# EAGLE board driver PCB 32 FEM (EAGLE 6.4)
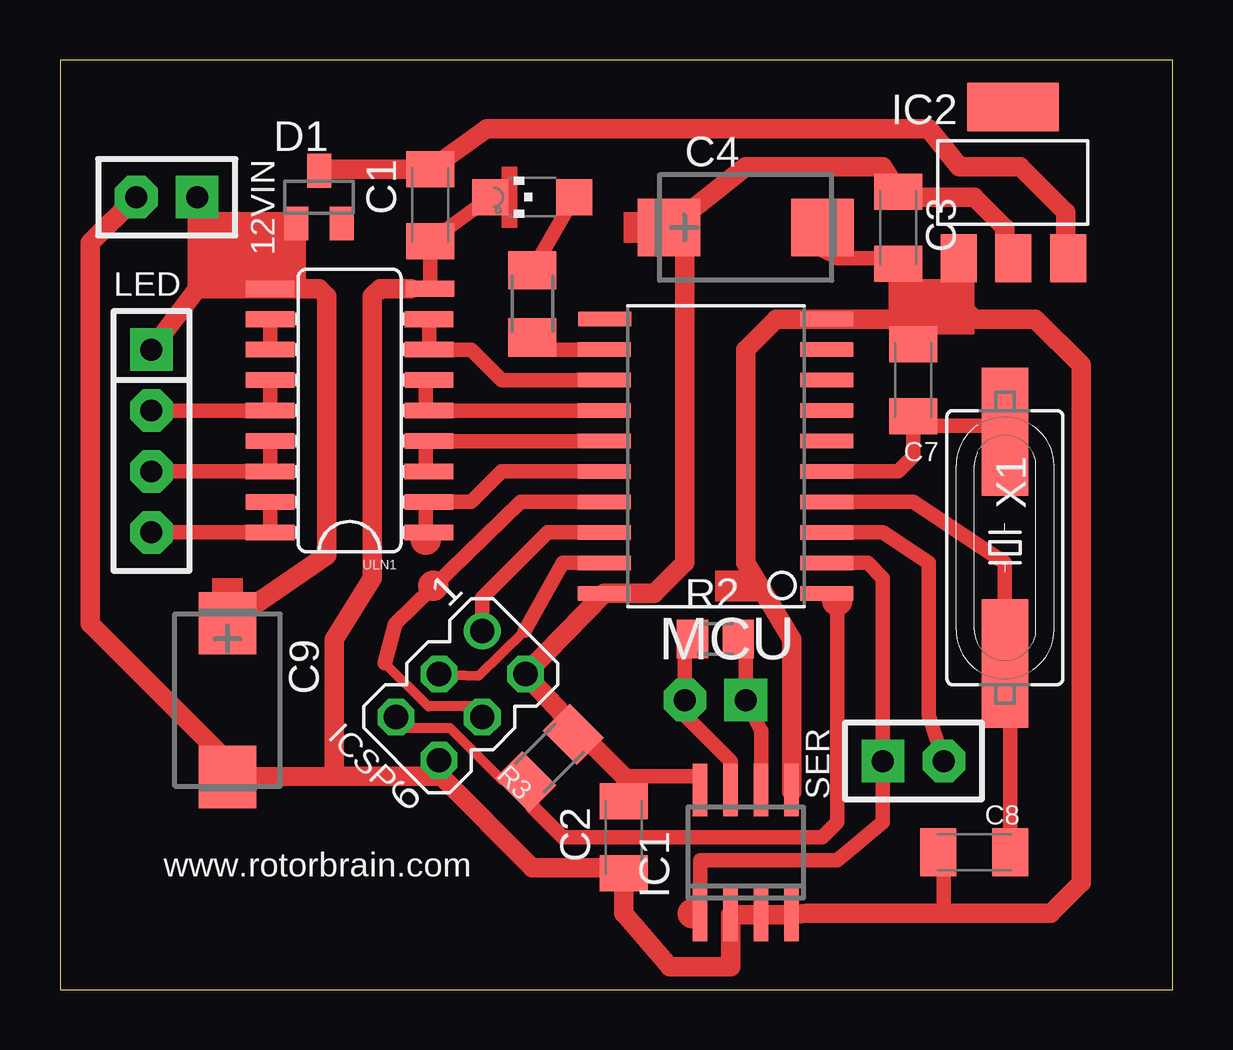
[diagram p0: board, top side]
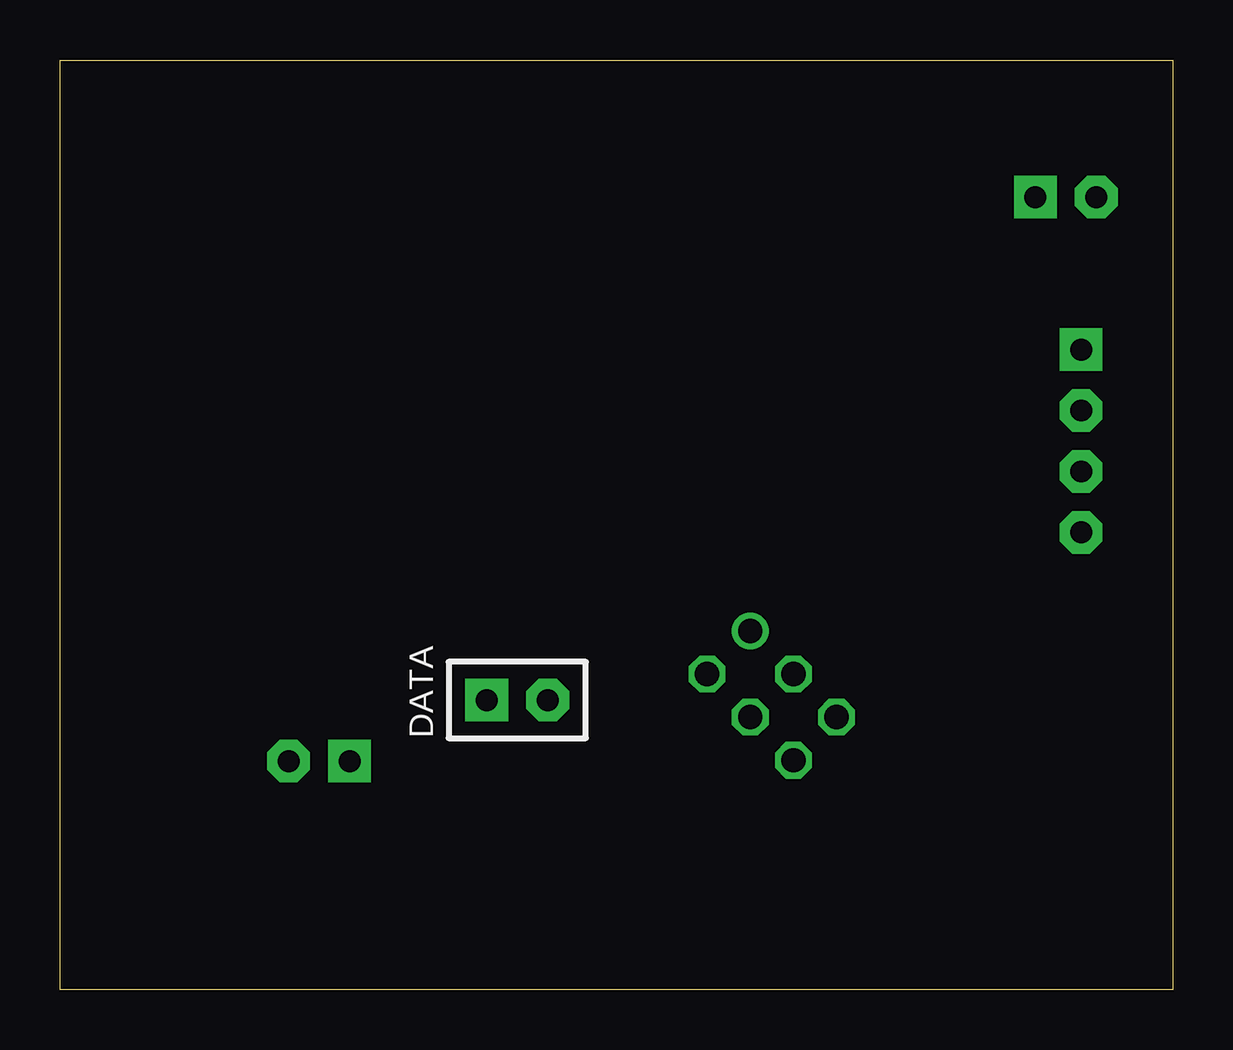
[diagram p1: board, bottom side, seen from below]

Size 46.35 x 38.73 mm. Coordinates in mm from the lower left corner, seen from the top.
Outline: 0,0 46.35,0 46.35,38.73 0,38.73 0,0
Copper layers (1*16): Top 0.035mm / dielectric 1.5mm / Bottom 0.035mm
Design rules "CNCmill *": minimum track width 10mil, minimum drill 24mil, track to track 10mil, track to pad 10mil, pad to pad 10mil, via to via 10mil, smd to smd 10mil, copper to edge 10mil, drill to drill 10mil, minimum pad ring 10mil, minimum via ring 8mil, stop-mask expansion 4mil, vias tented up to drill 0mil, thermal gap 10mil

## Footprints (pad centres in the part's own frame; a part is rotated, then mirrored left to right if it is on the bottom)
SIP-100-02 = drill 0.914 pad 1.778 square: 1 -1.27,0 | drill 0.914 pad 1.778 octagon: 2 1.27,0
C1206K = smd 1.5 x 2: 1 -1.5,0; 2 1.5,0
CT7343 = smd 2.6 x 2.4: + -3.2,0; - 3.2,0
SOT23 = smd 1 x 1.4: 1 -0.95,-1.1; 2 0.95,-1.1; 3 0,1.1
CHIPLED_1206 = smd 1.5 x 1.5: A 0,-1.75; C 0,1.75
SO-08 = smd 0.6 x 2.2: 1 -1.905,-2.6; 2 -0.635,-2.6; 3 0.635,-2.6; 4 1.905,-2.6; 5 1.905,2.6; 6 0.635,2.6; 7 -0.635,2.6; 8 -1.905,2.6
SOT223 = smd 1.499 x 2.007: 1 -2.261,-3.15; 2 0.025,-3.15; 3 2.311,-3.15 | smd 3.81 x 2.007: 4 0,3.15
MA03-2 = drill 1.016: 1 -2.54,-1.27 | drill 1.016 octagon: 2 -2.54,1.27; 3 0,-1.27; 4 0,1.27; 5 2.54,-1.27; 6 2.54,1.27
SIP-100-04 = drill 0.914 pad 1.778 square: 1 -3.81,0 | drill 0.914 pad 1.778 octagon: 2 -1.27,0; 3 1.27,0; 4 3.81,0
SO20L$ = smd 0.61 x 2.21: 1 -5.715,-4.636; 2 -4.445,-4.636; 3 -3.175,-4.636; 4 -1.905,-4.636; 5 -0.635,-4.636; 6 0.635,-4.636; 7 1.905,-4.636; 8 3.175,-4.636; 9 4.445,-4.636; 10 5.715,-4.636; 11 5.715,4.61; 12 4.445,4.636; 13 3.175,4.636; 14 1.905,4.636; 15 0.635,4.636; 16 -0.635,4.636; 17 -1.905,4.636; 18 -3.175,4.636; 19 -4.445,4.636; 20 -5.715,4.636
M1206 = smd 1.6 x 2: 1 -1.4,0; 2 1.4,0
M0805 = smd 1.3 x 1.6: 1 -0.95,0; 2 0.95,0
SO018 = smd 0.66 x 2.032: 1 -5.08,-3.315; 2 -3.81,-3.315; 3 -2.54,-3.315; 4 -1.27,-3.315; 5 0,-3.315; 6 1.27,-3.315; 7 2.54,-3.315; 8 3.81,-3.315; 9 5.08,-3.353; 10 5.08,3.315; 11 3.81,3.315; 12 2.54,3.315; 13 1.27,3.315; 14 0,3.315; 15 -1.27,3.315; 16 -2.54,3.315; 17 -3.81,3.315; 18 -5.08,3.315
HC49UP = smd 5.334 x 1.93: 1 -4.826,0; 2 4.826,0

## Placement (x,y rotation side)
12VIN  J-02  [SIP-100-02]  4.45,33.02 180 top
C1  1uF  [C1206K]  15.42,32.69 270 top
C2  1uF  [C1206K]  23.5,6.35 270 top
C3  1uF  [C1206K]  34.92,31.75 270 top
C4  22uF  [CT7343]  28.57,31.75 0 top
C7  18pf  [C1206K]  35.56,25.4 270 top
C8  18pf  [C1206K]  38.1,5.71 0 top
C9  22uF  [CT7343]  6.99,12.06 270 top
D1  [SOT23]  10.79,33.02 0 top
DATA  J-02  [SIP-100-02]  27.3,12.06 0 bottom
HEARTBEAT  [CHIPLED_1206]  19.68,33.02 90 top
IC1  75ALS176AD  [SO-08]  28.57,5.71 0 top
IC2  N1117  [SOT223]  39.7,33.63 0 top
ICSP  [MA03-2]  16.7,12.25 225 top
LED  J-04-SIP-100  [SIP-100-04]  3.81,22.86 270 top
MCU  TINY2313-*S*  [SO20L$]  27.3,22.23 90 top
R1  330  [M1206]  19.68,28.57 90 top
R2  330  [M0805]  27.3,14.61 0 top
R3  1k  [M1206]  20.4,9.65 45 top
SER  J-02  [SIP-100-02]  35.56,9.53 0 top
ULN1  Driver  [SO018]  12.06,24.13 90 top
X1  7.37 mHz  [HC49UP]  39.37,18.41 270 top

## Library data of the parts
12VIN DATA LED SER = con-headers-jp
C1-C4 C7-C9 R1-R3 = rcl
D1 = semicon-smd-ipc
HEARTBEAT = led
IC1 = texas
IC2 = burr-brown
ICSP = con-lstb
MCU = avr-6
ULN1 = SparkFun
X1 = crystal

## Nets
D+: DATA.1 IC1.6 R2.2
D-: DATA.2 IC1.7 R2.1
GND [GND]: 12VIN.2 C1.2 C2.2 C3.2 C4.- C7.1 C8.1 C9.- HEARTBEAT.C IC1.2 IC1.3 IC1.4 IC1.5 IC2.1 ICSP.6 MCU.10 ULN1.9
MCU_RST: ICSP.5 MCU.1 R3.1
MISO: ICSP.1 MCU.18
MOSI: ICSP.4 MCU.17
N$1: ULN1.11 ULN1.12
N$2: HEARTBEAT.A R1.2
N$4: LED.4 ULN1.17 ULN1.18
N$7 [GND]: C1.1 D1.3 IC2.3
N$9: LED.3 ULN1.15 ULN1.16
N$10: LED.2 ULN1.13 ULN1.14
OC0A: MCU.14 ULN1.5 ULN1.6
OC1A: MCU.15 ULN1.3 ULN1.4
OC1B: MCU.16 ULN1.1 ULN1.2
PB0: MCU.12 R1.1
PB1: MCU.13 ULN1.7 ULN1.8
PD2: MCU.6
PD3: MCU.7
PD4: MCU.8
PD5: MCU.9
PD6: MCU.11
TTL_RXD: IC1.1 MCU.2 SER.1
TTL_TXD: MCU.3 SER.2
USCK: ICSP.3 MCU.19
V+ [GND]: 12VIN.1 C9.+ D1.1 LED.1 ULN1.10
VCC: C2.1 C3.1 C4.+ IC1.8 IC2.2 ICSP.2 MCU.20 R3.2
XTAL1 [GND]: C8.2 MCU.4 X1.2
XTAL2 [GND]: C7.2 MCU.5 X1.1

## Tracks (layer width: path | path; a pad name or v marks a point on that pad's centre or on a via)
D+
  Top 0.61: IC1.6 29.21,10.79 DATA.1 28.57,14.61 28.4,14.78 R2.2
D-
  Top 0.61: IC1.7 27.94,9.53 26.04,11.43 DATA.2 26.04,14.61 26.21,14.78 R2.1
GND
  Top 0.406: IC2.1 37.47,30.45 | 14.61,29.21 ULN1.9 | IC1.5 30.54,8.31 30.48,8.26
  Top 0.61: 37.47,30.48 IC2.1 37.47,29.21 | 34.92,29.21 C3.2 | ULN1.9 C1.2 HEARTBEAT.C | 15.88,8.89 ICSP.6 | 23.27,5.08 C2.2 | 34.92,27.94 C7.1 | C3.2 35.33,30.25 34.92,29.84 C3.2 | C3.2 34.92,30.48 32.38,30.48 31.11,31.11 31.75,31.75 C4.- | C8.1 36.83,6.12 36.83,3.17
  Top 0.813: 37.47,29.21 37.47,28.57 38.1,27.94 40.64,27.94 42.55,26.04 42.55,4.45 41.27,3.17 36.83,3.17 31.11,3.17 IC1.4 IC1.3 IC1.2 27.94,0.95 25.4,0.95 23.5,3.17 C2.2 | 37.47,29.21 37.47,30.48 | 37.47,29.21 34.92,29.21 | 14.61,29.21 13.34,29.21 13.02,28.89 13.02,17.14 11.43,14.61 11.43,8.89 | 11.43,8.89 C9.- 6.99,9.53 1.27,15.24 1.27,31.11 12VIN.2 | 11.43,8.89 15.88,8.89 19.68,5.08 23.27,5.08 | 30.48,8.26 30.48,14.61 28.57,17.78 28.57,26.67 29.84,27.94 MCU.10 34.92,27.94 34.92,29.21 | 34.92,29.21 34.92,29.84
MCU_RST
  Top 0.406: ICSP.5 14.45,10.9 16.25,10.9 18.41,8.74 R3.1
  Top 0.61: MCU.1 32.38,16.51 32.38,6.99 31.75,6.35 20.95,6.35 19.68,7.62 19.68,8.26 19.41,8.53 R3.1 19.91,8.66
MISO
  Top 0.61: ICSP.1 17.59,16.32 20.32,19.05 MCU.18
MOSI
  Top 0.406: ICSP.4 17.14,11.8 15.35,11.8 13.53,13.6
  Top 0.61: MCU.17 19.2,20.32 13.97,15.24 13.53,13.6
N$1
  Top 0.61: ULN1.12 ULN1.11
N$2
  Top 0.61: R1.2 HEARTBEAT.A
N$4
  Top 0.61: ULN1.17 ULN1.18 LED.4
N$7
  Top 0.406: 41.91,30.58 IC2.3
  Top 0.813: 41.91,30.58 41.91,32.38 40.01,34.29 37.47,34.29 36.2,35.88 17.78,35.88 C1.1 10.89,34.19 10.79,34.29 D1.3
N$9
  Top 0.61: ULN1.15 ULN1.16 LED.3
N$10
  Top 0.61: ULN1.13 ULN1.14 LED.2
OC0A
  Top 0.406: ULN1.5 15.24,24.13 | 15.24,25.26 ULN1.6
  Top 0.61: ULN1.5 MCU.14 | 15.24,24.13 15.24,25.26
OC1A
  Top 0.406: 15.24,22.86 ULN1.4 | ULN1.3 15.24,21.73
  Top 0.61: ULN1.4 MCU.15 | 15.24,21.73 15.24,22.86
OC1B
  Top 0.406: 15.24,20.32 ULN1.2 | ULN1.1 15.24,19.19
  Top 0.61: 15.24,19.19 15.24,20.32 | ULN1.2 17.14,20.32 18.41,21.59 MCU.16
PB0
  Top 0.61: MCU.12 19.68,26.67 R1.1
PB1
  Top 0.61: MCU.13 18.41,25.4 17.14,26.67 ULN1.7 ULN1.8
TTL_RXD
  Top 0.61: IC1.1 26.67,5.4 32.38,5.4 34.29,6.99 SER.1 34.29,17.14 33.66,17.78 MCU.2
TTL_TXD
  Top 0.61: MCU.3 34.29,19.05 36.2,17.78 36.2,11.43 SER.2
USCK
  Top 0.406: ICSP.3 17.45,13.08 19.36,14.96
  Top 0.61: MCU.19 20.95,17.78 19.36,14.96
V+
  Top 0.406: 8.26,29.21 ULN1.10
  Top 0.813: 9.84,29.21 10.79,29.21 11.11,28.89 11.11,18.1 C9.+ | 9.84,29.21 8.26,29.21 5.71,29.21 | 5.71,29.21 12VIN.1 | 5.71,29.21 LED.1 | D1.1 9.84,31.11 9.84,29.21
VCC
  Top 0.406: 39.37,30.84 IC2.2
  Top 0.61: C3.1 35.56,33.02 | 26.04,31.11 C4.+ | 21.59,10.79 21.44,10.64 R3.2 21.74,10.64 | C2.1 23.5,8.89 26.67,8.89 IC1.8
  Top 0.813: 39.37,30.84 39.37,31.75 38.1,33.02 35.56,33.02 | C3.1 34.29,34.29 28.57,34.29 C4.+ | 26.04,31.11 26.04,17.78 24.77,16.51 MCU.20 ICSP.2 21.59,10.79 | 23.5,8.89 21.74,10.64
XTAL1
  Top 0.61: MCU.4 35.56,20.32 39.37,17.78 X1.2 38.99,13.74 39.6,13.13 C8.2
XTAL2
  Top 0.61: MCU.5 34.92,21.59 35.56,22.23 C7.2 35.97,23.5 38.73,23.5 X1.1
(copper drawn outside any net)
  shapes: Top area x6, Top circle x4

## Text on the board
tNames: www.rotorbrain.com
_tsilk: C7 | C6 | SJ9 | 1 | 5 | 4 | 3 | 2 | 1 | 0 | IC6 | C10 | C9 | ICSP | PC0-PC5 | R3 | POT | PB0-PB5 | C11 | C20 | C17 | PD0-PD3 | MEGA168 | X1 | C14 | PD4- | PD7 | C16 | C19 | C15
_bsilk: SJ6 | SJ7